# Altium PCB pcb_full_revC.PcbDoc
Units mm, origin at the board's own origin, x right, y up, seen from the top; angles counter-clockwise.
Board outline 60 x 60 mm, 2 copper layers (Top Layer, Bottom Layer); 37 components, 47 nets, 149 pads, 40 vias.
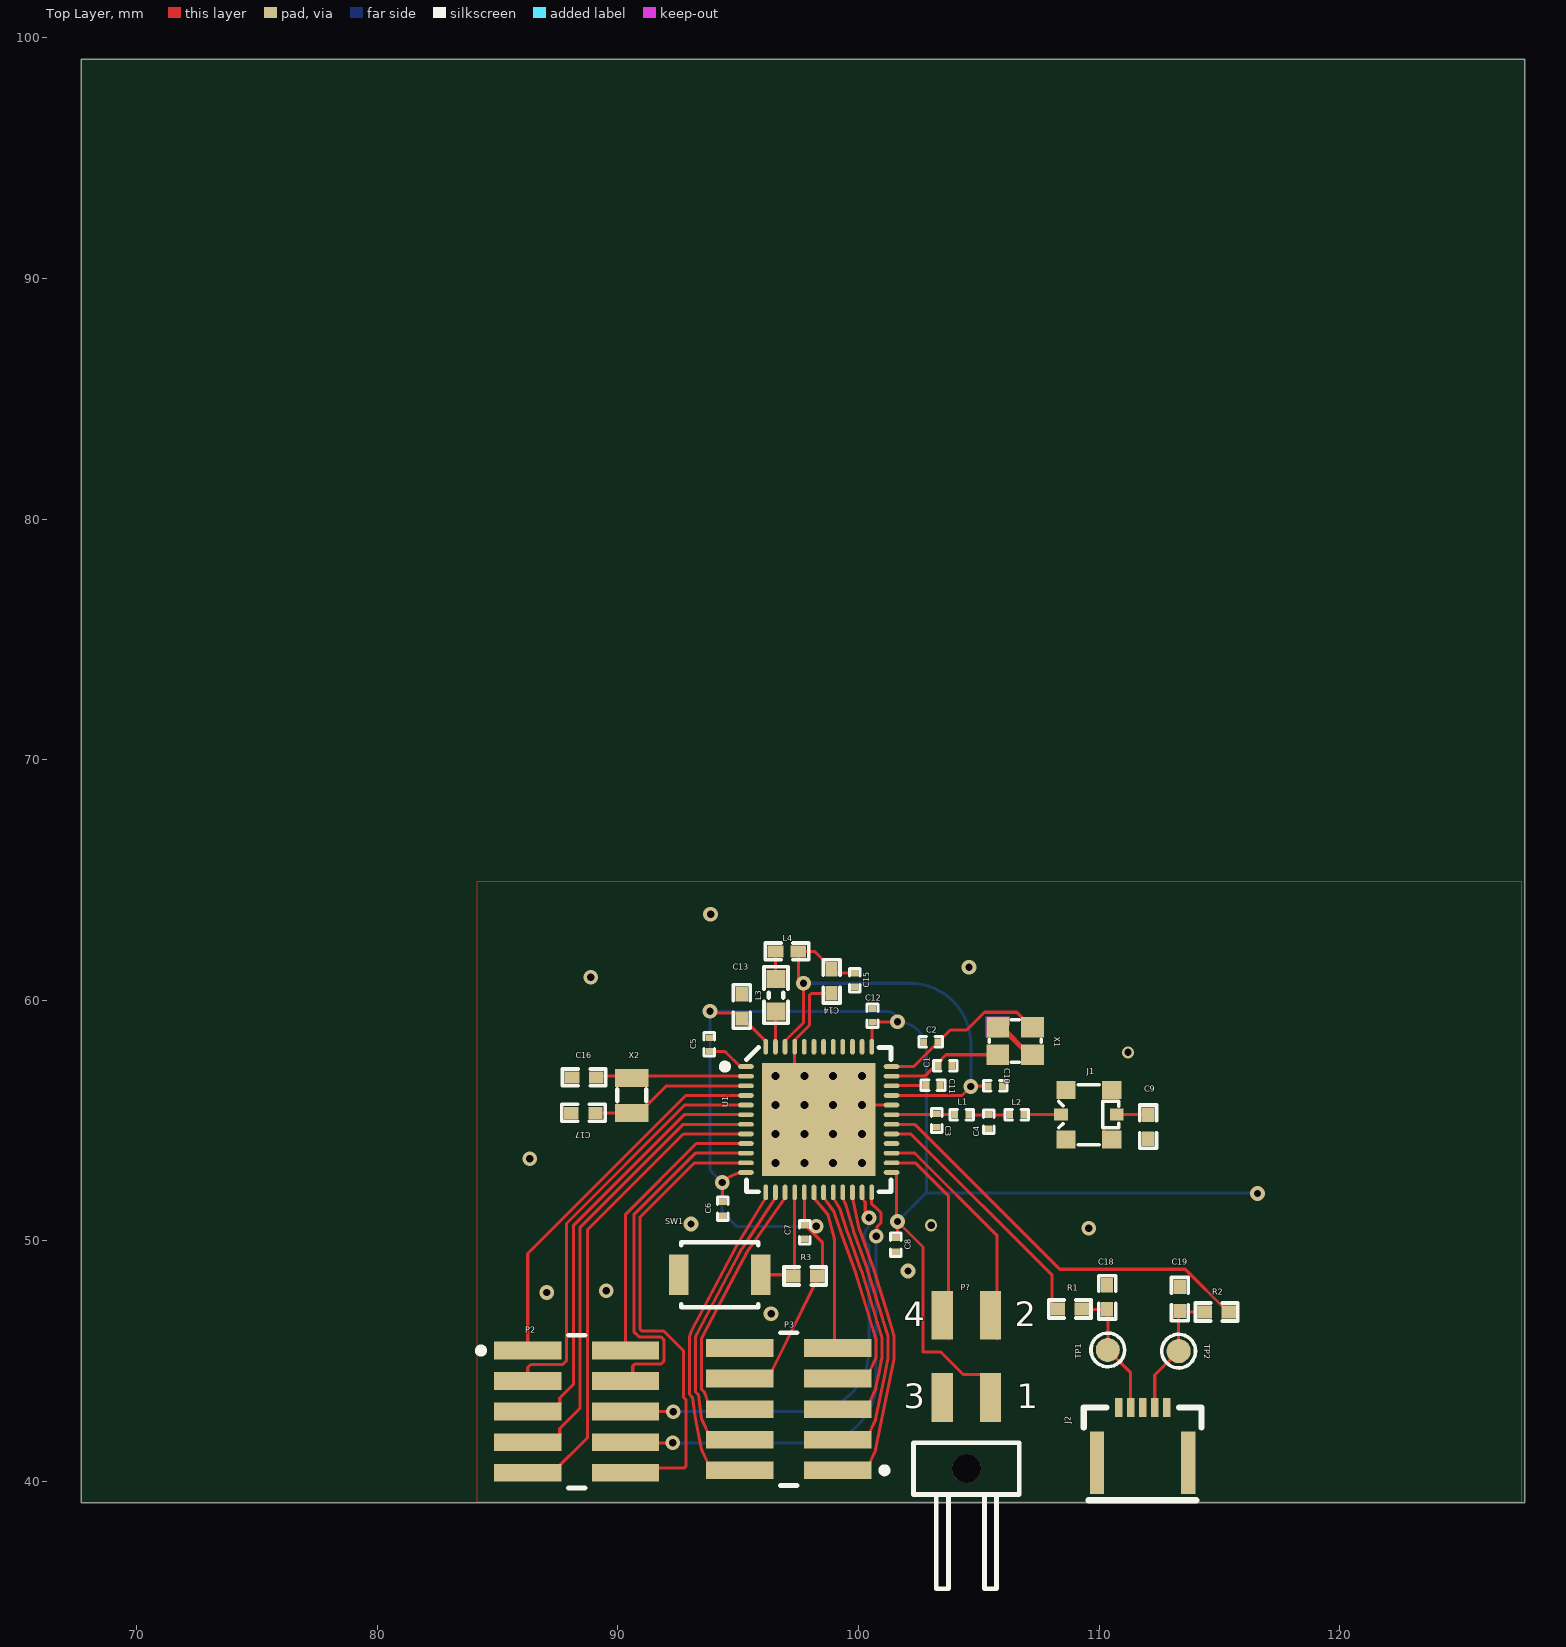
[diagram p0: Top Layer view]
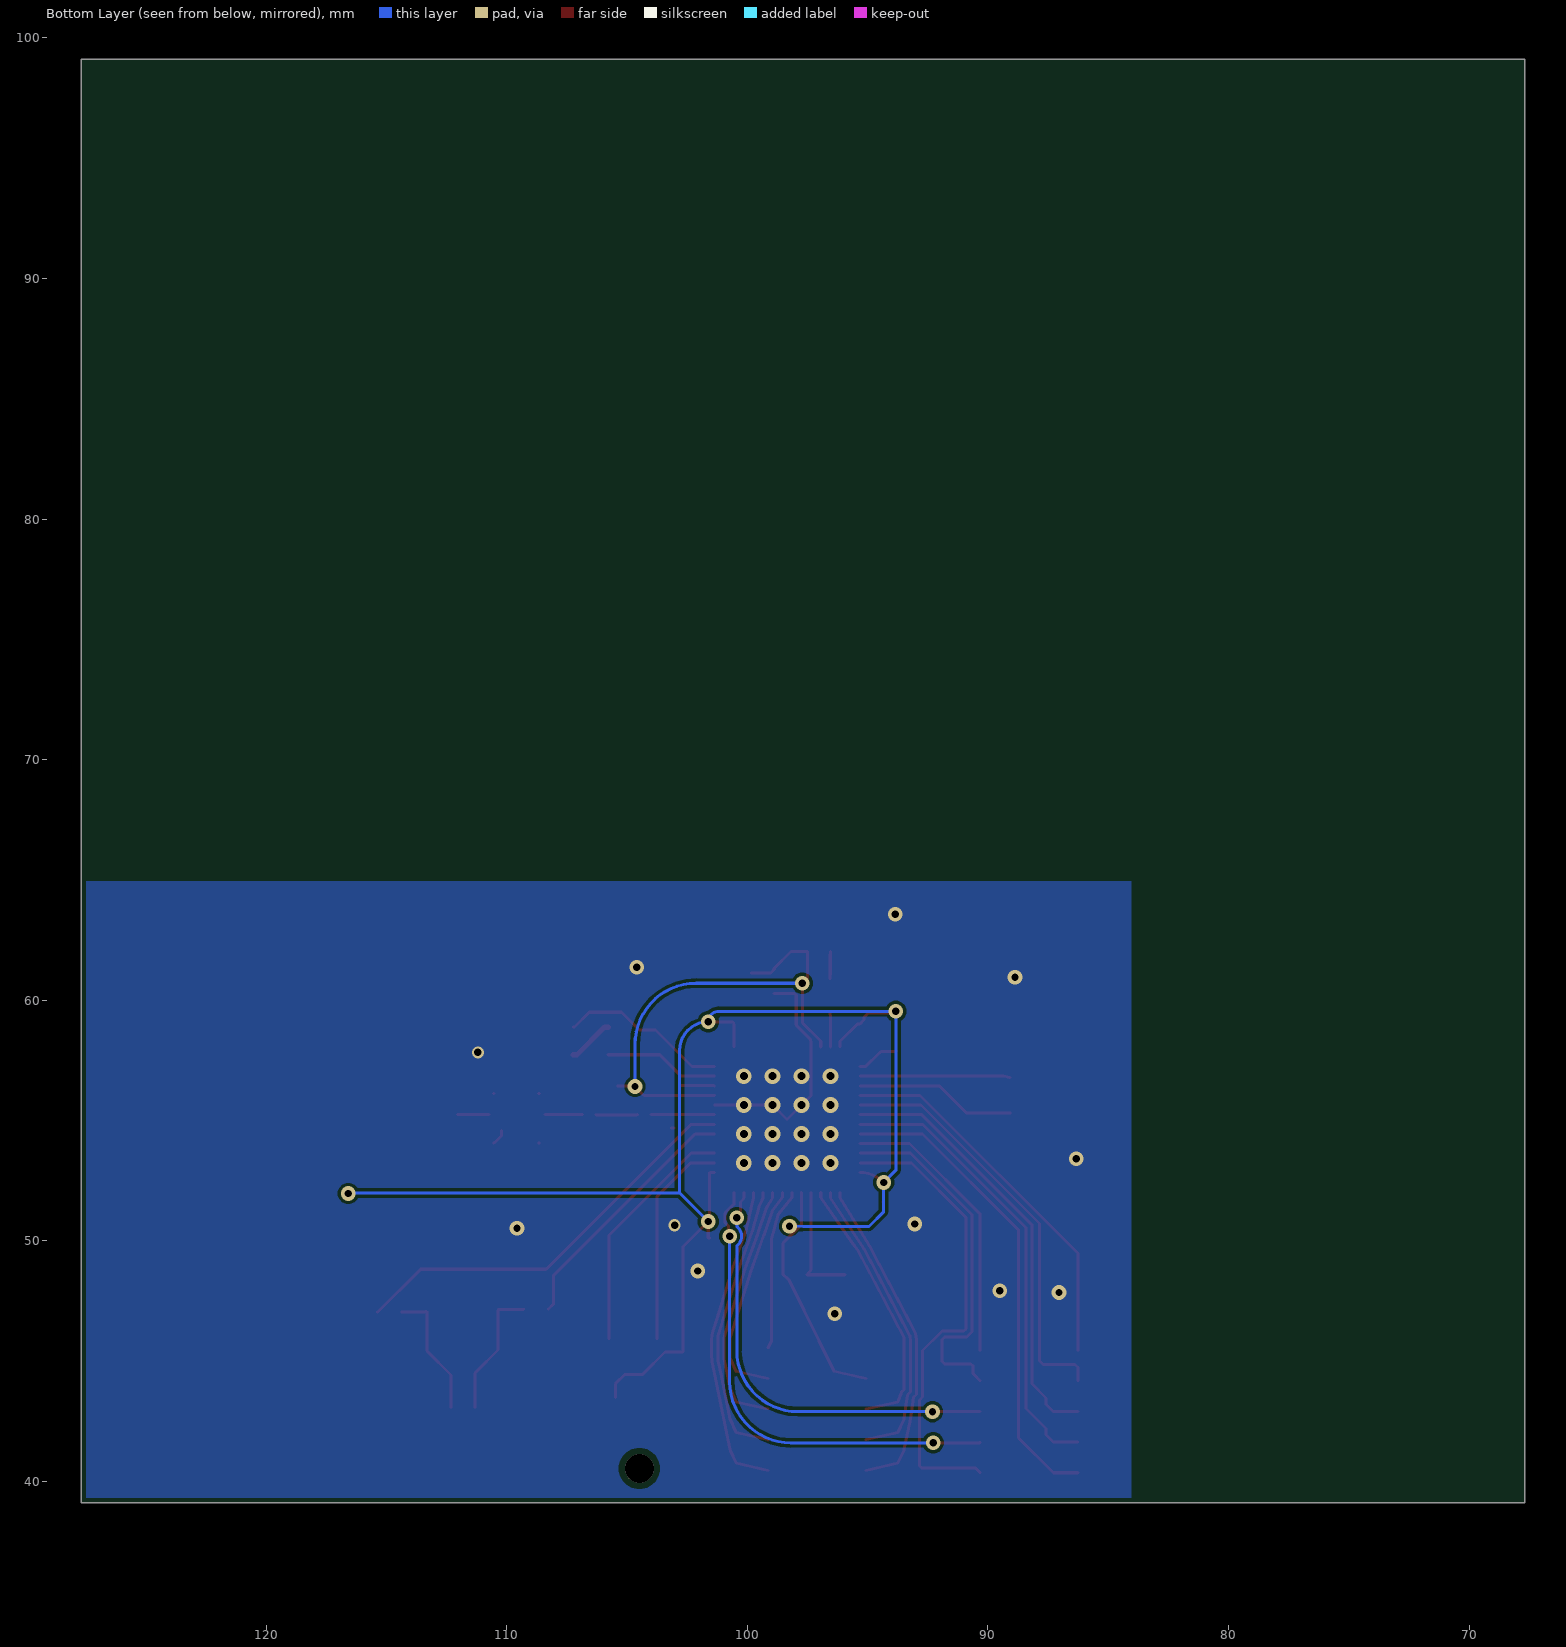
[diagram p1: Bottom Layer view, seen from below]
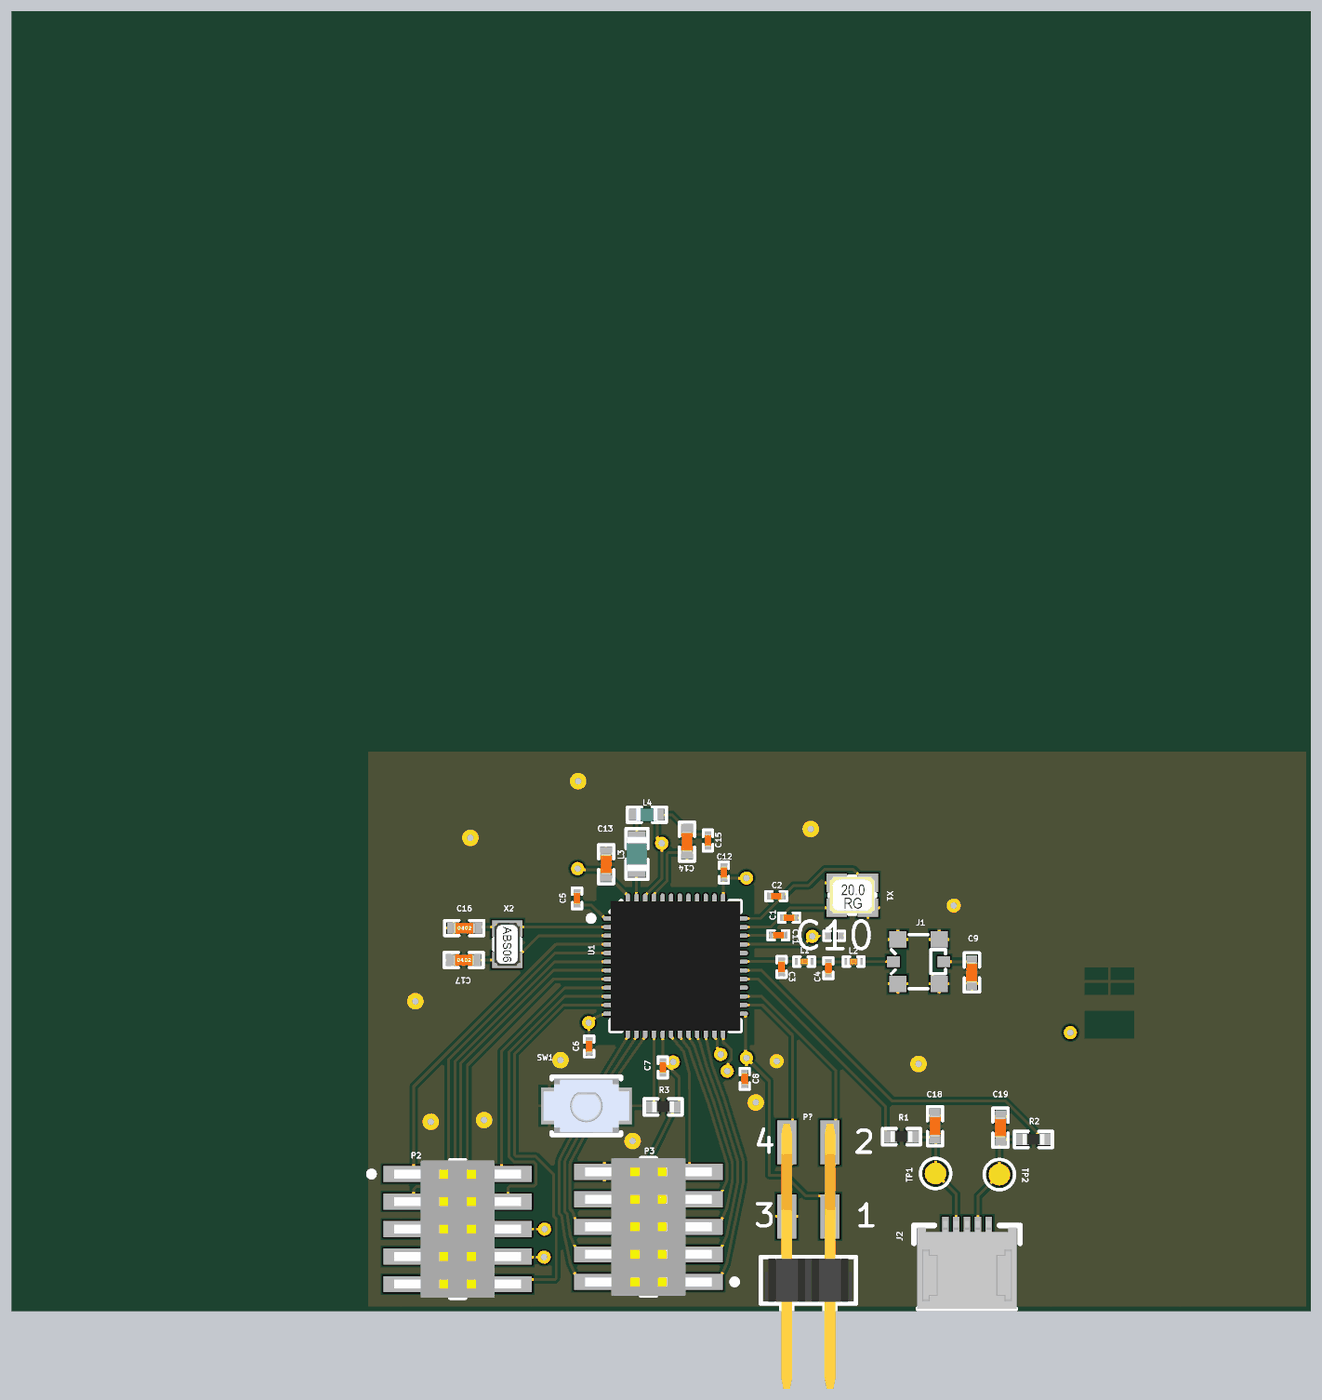
[diagram p2: 3D render of the assembled board from above, using the file's embedded part models]

## Layer stack, top to bottom
Top Solder: solder mask 0.0102, Solder Resist, Dk 3.5
Top Layer: signal copper 0.0356
Dielectric 1: dielectric 0.32, FR-4, Dk 4.8
Bottom Layer: signal copper 0.0356
Bottom Solder: solder mask 0.0102, Solder Resist, Dk 3.5

## Board outline
67.691,39.116 67.691,99.116 127.691,99.116 127.691,39.116

## Design rules (kind name [scope] priority, off if disabled: settings)
BoardOutlineClearance [All] p1: gap=0.2 ignorepadtopadclearanceinfootprint=FALSE
Clearance [All] p1: gap=0.127 ignorepadtopadclearanceinfootprint=FALSE except(0.25: Arc-Hole Track-Hole SMDPad-Hole THPad-Hole Via-Hole Fill-Hole Poly-Hole Region-Hole Text-Hole)
ComponentClearance [All] p1: gap=0.127 collisioncheckmode=3 verticalgap=0.127 showdistances=TRUE
DiffPairsRouting [All] p1: maxlimit=0.254 minlimit=0.127 mostfreqgap=0.127 toplayer_minwidth=0.127 toplayer_maxwidth=25.4 toplayer_prefwidth=0.127 bottomlayer_minwidth=0.127 bottomlayer_maxwidth=25.4 bottomlayer_prefwidth=0.127 maxuncoupledlength=12.7
Height [All] p1: minheight=0 maxheight=1816.048 prefheight=12.7
HoleSize [All] p1: absolutevalues=TRUE maxlimit=6.3 minlimit=0.3 maxpercent=80.000 minpercent=20.000
HoleToHoleClearance [All] p1: gap=0.25 allowstackedmicrovias=FALSE
MinimumAnnularRing [All] p1: minimumring=0.076
MinimumSolderMaskSliver [All] p1: minsoldermaskwidth=0
PlaneClearance [All] p1: clearance=0.127
PlaneConnect PlaneConnectPowerPads [InPadClass('PowerPads')] p1: planeconnectstyle=Direct reliefexpansion=0.508 reliefentries=4 reliefconductorwidth=0.254 reliefairgap=0.254
PlaneConnect [All] p2: pad.planeconnectstyle=Relief pad.reliefexpansion=0.3 pad.reliefentries=4 pad.reliefconductorwidth=0.127 pad.reliefairgap=0.127 via.planeconnectstyle=Direct via.reliefexpansion=0.3 via.reliefentries=4 via.reliefconductorwidth=0.127 via.reliefairgap=0.127
PolygonConnect PolygonConnectPowerPads [All vs (InPadClass('PowerPads'))] p1: connectstyle=Direct reliefconductorwidth=0.254 reliefentries=4 polygonreliefangle="90 Angle" airgapwidth=0.254
PolygonConnect [All] p2: thpad.connectstyle=Relief thpad.reliefconductorwidth=0.127 thpad.reliefentries=4 thpad.polygonreliefangle="90 Angle" thpad.airgapwidth=0.127 smdpad.connectstyle=Relief smdpad.reliefconductorwidth=0.127 smdpad.reliefentries=4 smdpad.polygonreliefangle="90 Angle" smdpad.airgapwidth=0.127 via.connectstyle=Direct via.reliefconductorwidth=0.127 via.reliefentries=4 via.polygonreliefangle="90 Angle" via.airgapwidth=0.127
RoutingVias [All] p1: holewidth=0.3 width=0.6 viastyle="Through Hole" minholewidth=0.3 minwidth=0.6 maxholewidth=0.6 maxwidth=6.6
SilkToSilkClearance [All] p1: silktosilkclearance=0
SilkToSolderMaskClearance [IsPad] p1: minsilkscreentomaskgap=0.127 clearancetoexposedcopper=TRUE
SolderMaskExpansion [All] p1: expansion=0.075 istentingtop=FALSE
Width [All] p1: maxlimit=25.4 minlimit=0.127 preferedwidth=0.127 minimp=50.000000 maximp=50.000000 favimp=50.000000
20 further rules are at their usual default settings.

## Components (designator, comment, footprint, x,y, rotation, side; value= is the part's Value field where it differs from the comment)
C1 "12pF" CAPC0603X03L_C 103.601,57.277 r0 top
C2 "12pF" CAPC0603X03L_C 103.003,58.268 r180 top
C3 "1.0pF" CAPC0603X03L_C 103.249,55.002 r90 top
C4 "1.2pF" CAPC0603X03L_C 105.41,54.946 r90 top
C5 "100nF" CAPC0603X03L_C 93.802,58.166 r90 top
C6 "100nF" CAPC0603X03L_C 94.361,51.333 r270 top
C7 "100nF" CAPC0603X03L_C 97.765,50.363 r270 top
C8 "100nF" CAPC0603X03L_C 101.549,49.835 r270 top
C9 "1.2pF" CAPC1005X04L 112.039,54.745 r270 top
C10 "N.C." CAPC0603X03L_C_NC 105.684,56.439 r180 top
C11 "100pF" CAPC0603X03L_C 103.099,56.464 r0 top
C12 "100nF" CAPC0603X03L_C 100.584,59.36 r90 top
C13 "1.0µF" CAPC1005X04L 95.148,59.741 r90 top
C14 "1.0µF" CAPC1005X04L 98.882,60.782 r90 top
C15 "47nF" CAPC0603X03L_C 99.847,60.839 r270 top
C16 "12pF" CAPC1005X04L 88.595,56.794 r180 top
C17 "12pF" CAPC1005X04L 88.57,55.321 r180 top
C18 "300pF" CAPC1005X04L 110.338,47.65 r90 top
C19 "300pF" CAPC1005X04L 113.36,47.582 r270 top
J1 "MM8130-2600" COAXIAL-SWF 109.576,55.245 r90 top (schematic designator J4)
J2 "" FPC_05P-0.5mm-RA-SMD 110.816,43.067 r0 top value="FPC 0.5mm RA SMD"
L1 "4.7nH" INDC0603X03L_C 104.292,55.245 r0 top
L2 "2.2nH" INDC0603X03L_C 106.578,55.245 r0 top
L3 "10µH" INDC1608X06L 96.571,60.213 r270 top
L4 "15nH" INDC1005X04L 97.028,62.027 r180 top
P2 "FTSH-105-01-L-DV" SMTC-FTSH-105-01-L-DV_V 88.287,42.901 r270 top
P3 "FTSH-105-01-L-DV" SMTC-FTSH-105-01-L-DV_V 97.101,43.002 r90 top
P? "621304284521" 621304284521 104.486,40.535 r0 top
R1 "0R" RESC1005X04L 108.79,47.168 r180 top
R2 "0R" RESC1005X04L 114.884,47.041 r0 top
R3 "N.C." RESC1005X04L 97.782,48.539 r0 top
SW1 "B3U-1000P" FP-B3U-1000P-MFG 94.234,48.59 r0 top
TP1 "Ø1.0mm,SMD" TP_SMD_Ø1.0mm 110.363,45.466 r0 top
TP2 "Ø1.0mm,SMD" TP_SMD_Ø1.0mm 113.309,45.415 r90 top
U1 "nRF52840-QFAA" QFN40P600X600X90-48N 98.349,55.042 r0 top
X1 "" XTAL_2016_NT 106.514,58.309 r0 top value=32MHz
X2 "" XTAL_2012 90.576,56.046 r270 top value=32.768kHz

## Footprints (in the part's own frame and the unit in brackets; to place one, negate y for a bottom-side part, rotate by r counter-clockwise, add the part's x,y. Pads: shape width x height; smd on the part's side, far side on the other; paste and mask are expansions set on the pad)
621304284521 [mm] "Pin Header, pitch 2.00 mm, SMD, Angled, dual row, 4p"
  rect 0.89x2.03 smd: 1(1,2.95) 2(1,6.37) 3(-1,2.95) 4(-1,6.37)
  round 1.2 hole 1.2 unplated: MH1(0,0)
  silkscreen extent -2.2,-5 2.2,1.07, body extent -2,-5 2,7.22, height 4.02
CAPC0603X03L_C [mm]
  rect 0.27x0.3 smd: 1(-0.285,0) 2(0.285,0)
  silkscreen extent -0.49,-0.22 0.49,0.22, body extent -0.3,-0.15 0.31,0.15, height 0.3
CAPC0603X03L_C_NC [mm]
  rect 0.27x0.3 smd mask+0.05: 1(-0.285,0) 2(0.285,0)
  silkscreen extent -0.49,-0.22 0.49,0.22
CAPC1005X04L [mm]
  rect 0.6x0.5 smd: 1(-0.5,0) 2(0.5,0)
  silkscreen extent -0.9,-0.35 0.9,0.35, body extent -0.51,-0.25 0.51,0.25, height 0.5
COAXIAL-SWF [mm]
  rect 0.5x0.58 smd: 1(0,1.16) 3(0,-1.16)
  rect 0.75x0.8 smd: 2(-1.025,-0.95) 2(-1.025,0.95) 2(1.025,-0.95) 2(1.025,0.95)
  Top Layer pour cut-out: -0.65,0.55 0.65,0.55 0.65,1.35 -0.65,1.35
  Top Layer pour cut-out: 0.65,-0.55 -0.65,-0.55 -0.65,-1.35 0.65,-1.35
  silkscreen extent -1.25,-1.25 1.25,1.25, body extent -1.26,-1.3 1.26,1.3, height 1.55
FP-B3U-1000P-MFG [mm]
  rect 0.8x1.7 smd paste+0 mask+0: 1(-1.7,0) 2(1.7,0)
  silkscreen extent -1.6,-1.35 1.6,1.35, body extent -2.2,-1.45 2.2,1.45, height 0.25
FPC_05P-0.5mm-RA-SMD [mm]
  rect 0.6x2.6 smd: 0(-0.9,-2.3) 0(2.9,-2.3)
  rect 0.3x0.8 smd: 1(0,0) 2(0.5,0) 3(1,0) 4(1.5,0) 5(2,0)
  silkscreen extent -1.45,-3.85 3.45,0, body extent -1.3,-3.85 3.3,0.2, height 1.2
INDC0603X03L_C [mm]
  rect 0.27x0.3 smd: 1(-0.285,0) 2(0.285,0)
  silkscreen extent -0.49,-0.22 0.49,0.22, body extent -0.31,-0.16 0.31,0.16, height 0.26
INDC1005X04L [mm]
  rect 0.65x0.5 smd: 1(-0.475,0) 2(0.475,0)
  silkscreen extent -0.9,-0.35 0.9,0.35, body extent -0.5,-0.3 0.5,0.3, height 0.5
INDC1608X06L [mm]
  rect 0.75x0.8 smd: 1(-0.675,0) 2(0.675,0)
  silkscreen extent -1.17,-0.5 1.17,0.5, body extent -0.8,-0.48 0.8,0.48, height 0.8
QFN40P600X600X90-48N [mm]
  oval 0.65x0.2 smd: 1(-3.025,2.2) 2(-3.025,1.8) 3(-3.025,1.4) 4(-3.025,1) 5(-3.025,0.6) 6(-3.025,0.2) 7(-3.025,-0.2) 8(-3.025,-0.6) 9(-3.025,-1) 10(-3.025,-1.4) 11(-3.025,-1.8) 12(-3.025,-2.2) 25(3.025,-2.2) 26(3.025,-1.8) 27(3.025,-1.4) 28(3.025,-1) 29(3.025,-0.6) 30(3.025,-0.2) 31(3.025,0.2) 32(3.025,0.6) 33(3.025,1) 34(3.025,1.4) 35(3.025,1.8) 36(3.025,2.2)
  oval 0.2x0.65 smd: 13(-2.2,-3.025) 14(-1.8,-3.025) 15(-1.4,-3.025) 16(-1,-3.025) 17(-0.6,-3.025) 18(-0.2,-3.025) 19(0.2,-3.025) 20(0.6,-3.025) 21(1,-3.025) 22(1.4,-3.025) 23(1.8,-3.025) 24(2.2,-3.025) 37(2.2,3.025) 38(1.8,3.025) 39(1.4,3.025) 40(1,3.025) 41(0.6,3.025) 42(0.2,3.025) 43(-0.2,3.025) 44(-0.6,3.025) 45(-1,3.025) 46(-1.4,3.025) 47(-1.8,3.025) 48(-2.2,3.025)
  rect 4.7x4.7 smd: 49(0,0)
  silkscreen extent -4.02,-3 3,3, body extent -3.02,-3.02 3.02,3.02, height 0.86
RESC1005X04L [mm]
  rect 0.6x0.55 smd: 1(-0.5,0) 2(0.5,0)
  silkscreen extent -0.87,-0.38 0.88,0.38, body extent -0.5,-0.25 0.5,0.25, height 0.3
SMTC-FTSH-105-01-L-DV_V [mm] "CONN, 10-Leads, Body 6.35x3.43mm, Pitch 1.27mm"
  rect 0.74x2.79 smd: 1(-2.54,-2.035) 2(-2.54,2.035) 3(-1.27,-2.035) 4(-1.27,2.035) 5(0,-2.035) 6(0,2.035) 7(1.27,-2.035) 8(1.27,2.035) 9(2.54,-2.035) 10(2.54,2.035)
  silkscreen extent -3.17,-4.1 3.17,0.34, body extent -3.17,-2.92 3.18,2.92, height 5.96
TP_SMD_Ø1.0mm [mm]
  round 1 smd paste-5: 1(0,0)
  silkscreen extent -0.7,-0.7 0.7,0.7
XTAL_2012 [mm]
  rect 0.75x1.4 smd: 1(-0.725,0) 2(0.725,0)
  silkscreen extent -0.24,-0.6 0.24,0.6, body extent -1,-0.61 1,0.61, height 0.6
XTAL_2016_NT [mm]
  rect 0.95x0.85 smd: 1(-0.725,-0.575) 2(-0.725,0.575) 2(0.725,-0.575) 3(0.725,0.575)
  Top Layer lines w0.225: -0.725,0.575 -0.575,0.575 0.575,-0.575 0.725,-0.575
  Top Layer keep-out lines w0.01: -0.55,0.15 -1.2,0.15 -1.2,1 -0.25,1 -0.25,0.65
  silkscreen extent -1.08,-0.88 1.08,0.88, body extent -1.05,-0.85 1.05,0.85, height 0.56

## Part data
C1 C2: library part C0201-12p, "Capacitor, NP0, ±2%", Component Class=Capacitors, Footprint Doc=0201, LatestRevisionDate=2017-11-09, Pad Count=2, Part Number=C0201-12p, Published=2014-11-13
C3: library part C0201-1.0p, "Capacitor, NP0, ±10%", Component Class=Capacitors, Footprint Doc=0201, LatestRevisionDate=2018-10-22, Pad Count=2, Part Number=C0201-1.0p, Published=2014-11-13
C4: library part C0201-1.2p, "Capacitor, NP0, ±10%", Component Class=Capacitors, Footprint Doc=0201, LatestRevisionDate=2020-10-13, Pad Count=2, Part Number=C0201-1.2p, Published=2014-11-13
C5 C6 C7 C8 C12: library part C0201-100n, "Capacitor, X5R, ±10%", Component Class=Capacitors, Footprint Doc=0201, LatestRevisionDate=2017-11-09, Pad Count=2, Part Number=C0201-100n, Published=2014-11-13
C9: library part C0402-1.2p, "Capacitor, NP0, ±0.1pF", Manufacturer=N.A., Part number IPS=00000005410, Artikkelnr Noca=20029157, Author=rsk, Component Class=Capacitors, ComponentLink1Description=Datasheet, ComponentLink1URL=N.A., ComponentLink2Description="Supplier link", ComponentLink2URL=N.A., Footprint Doc=0402, HelpURL=N.A., LatestRevisionDate=2011-05-11, Manufacturer Part Number=N.A., Note=50V, Pad Count=2, Part Number=C0402-1.2p, Part number Norautron=N.A., PartId=100200119, Pin Count=2, Published=2009-05-08, Publisher="Nordic Semiconductor", Supplier 1=N.A., Supplier 2=N.A., Supplier Part Number 1=N.A., Supplier Part Number 2=N.A.
C10: library part C0201-N.C., "Not mounted", Assembly="Not mounted", Component Class=Capacitors, Footprint Doc=0201, LatestRevisionDate=2014-11-13, Pad Count=2, Part Number=C0201-N.C., Published=2014-11-13
C11: library part C0201-100p, "Capacitor, NP0, ±5%", Component Class=Capacitors, Footprint Doc=0201, LatestRevisionDate=2019-04-16, Pad Count=2, Part Number=C0201-100p, Published=2019-04-16
C13 C14: library part C0402-1µ0, "Capacitor, X5R, ±10%", Component Class=Capacitors, Footprint Doc=0402, LatestRevisionDate=2016-08-22, Pad Count=2, Part Number=C0402-1µ0, Published=2009-05-08
C15: library part C0201-47n, "Capacitor, X5R, ±10%", Component Class=Capacitors, Footprint Doc=0201, LatestRevisionDate=2017-11-09, Pad Count=2, Part Number=C0201-47n, Published=2014-11-13
C16 C17: library part C0402-12p, "Capacitor, NP0, ±2%", Manufacturer=N.A., Part number IPS=00000002398, Artikkelnr Noca=20029159, Author=rsk, Component Class=Capacitors, ComponentLink1Description=Datasheet, ComponentLink1URL=N.A., ComponentLink2Description="Supplier link", ComponentLink2URL=N.A., Footprint Doc=0402, HelpURL=N.A., LatestRevisionDate=2011-05-11, Manufacturer Part Number=N.A., Note=50V, Pad Count=2, Part Number=C0402-12p, Part number Norautron=N.A., PartId=100200137, Pin Count=2, Published=2009-05-08, Publisher="Nordic Semiconductor", Supplier 1=N.A., Supplier 2=N.A., Supplier Part Number 1=N.A., Supplier Part Number 2=N.A.
C18 C19: library part C0402-300p, "Capacitor, NP0, ±5%", Manufacturer=N.A., Part number IPS=00000007788, Supplier Part Number 1=490-3234-1-ND, Artikkelnr Noca=20020004, Author=rsk, Component Class=Capacitors, ComponentLink1Description=Datasheet, ComponentLink1URL=N.A., ComponentLink2Description="Supplier link", ComponentLink2URL=N.A., Footprint Doc=0402, HelpURL=N.A., LatestRevisionDate=2020-10-13, Manufacturer Part Number=N.A., Note=50V, Pad Count=2, Part Number=C0402-300p, Part number Norautron=N.A., PartId=100200155, Pin Count=2, Published=2015-05-29, Publisher="Nordic Semiconductor", Supplier 1=Digi-Key, Supplier 2=N.A., Supplier Part Number 2=N.A.
J1: library part CMP-15831-000105-1, "CONN HEADER VERT 2POS 2.54MM", Manufacturer=Murata, Part number IPS=00000009955, Part number Norautron=N.A., Supplier Part Number 1=490-4981-1-ND, Artikkelnr Noca=55029011, Author=rsk, Component Class=Connectors, ComponentLink1Description=Datasheet, ComponentLink1URL=N.A., ComponentLink2Description="Supplier link", ComponentLink2URL=N.A., Footprint Doc=COAXIAL-SWF, HelpURL=http://www.murata.com/products/catalog/pdf/o33e.pdf, LatestRevisionDate=2014-04-24, Manufacturer Part Number=MM8130-2600, Note=N.A., Pad Count=3, Part Number=MM8130-2600, PartId=100500400, Pin Count=3, Published=2014-04-24, Publisher="Nordic Semiconductor", Supplier 1=Digi-Key, Supplier 2=Mouser, Supplier Part Number 2=81-MM8130-2600RA2
J2: library part FPC_05P-0.5mm-RA-SMD, "0.5mm FPC, 5P,Right Angle SMT,Double Contact,H=1.2mm,White, Tin plated", Manufacturer=W-CON, Manufacturer Part Number=5141-05RZDNWR01, Part number IPS=00000007792, Part number Norautron=N.A., Artikkelnr Noca=55010020, Author=rsk, Component Class=Connectors, ComponentLink1Description=Datasheet, ComponentLink1URL=N.A., ComponentLink2Description="Supplier link", ComponentLink2URL=N.A., Footprint Doc=FPC_05P-0.5mm-RA-SMD, HelpURL=\\hizz\pro\app9717\Datasheet\connectors\W-CON\5141-XXRZDNXX0X.pdf, LatestRevisionDate=2016-04-21, Note=N.A., Pad Count=7, Part Number=FPC_05P-0.5mm-RA-SMD, PartId=100500528, Pin Count=7, Published=2015-06-22, Publisher="Nordic Semiconductor", Supplier 1=Cabcon, Supplier 2=Digi-Key, Supplier Part Number 1=5141-05RZDNWR01, Supplier Part Number 2=WM9836CT-ND
L1: library part L0201-4n7, "High frequency chip inductor ±5%", Component Class=Inductors, Footprint Doc=0201, LatestRevisionDate=2013-04-10, Pad Count=2, Part Number=L0201-4n7, Published=2013-04-10
L2: library part L0201-2n2, "High frequency chip inductor ±5%", Component Class=Inductors, Footprint Doc=0201, LatestRevisionDate=2013-04-10, Pad Count=2, Part Number=L0201-2n2, Published=2013-04-10
L3: library part L0603-10µ-TDK, "Chip inductor, IDC,min = 50 mA, ±20%", Component Class=Inductors, Footprint Doc=0603, LatestRevisionDate=2012-09-19, Pad Count=2, Part Number=L0603-10µ-TDK, Published=2019-05-06
L4: library part L0402-15n, "High frequency chip inductor ±10%", Component Class=Inductors, Footprint Doc=0402, LatestRevisionDate=2012-09-19, Pad Count=2, Part Number=L0402-15n, Published=2010-07-12
P2 P3: library part CMP-2000-05354-1, "Male Header, Pitch 1.27 mm, 2 x 5 Position, Height 5.96 mm, -55 to 125 degC, RoHS, Bulk", Color=Black, Manufacturer=Samtec, Standard Package=1, Catalog Drawings=FTSHSeriesFTSHSeriesSMTSide, Category=Connectors,Interconnects, Connector Type=Header,Unshrouded, Contact Finish=Gold, Contact Finish Thickness=10µin(0.25µm), Contact Mating Length="0.120\"(3.05mm)", Contact Type=MalePin, Datasheet URL=https://datasheet.ciiva.com/30493/0900766b80adfe36-30493006.pdf, Datasheet Version=Feb-08, EDA / CAD Models=DownloadfromAcceleratedDesigns, Family=RectangularConnectors-Headers,MalePins, Fastening Type=-, Featured Product=Board-To-BoardInterconnectSystems, Features=-, Manufacturer URL=http://www.samtec.com/, Mating Products="FLE-105-01-G-DV-TR-ND-CONNSKT1.27MM10POSDUALSMDCLP-105-02-G-D-P-TR-ND-CONNRCPT10POSDUAL.05\"SMDSFMC-105-L2-S-D-TR-ND-CONN.05\"SURFACE10POSSMTSFMH-105-02-L-D-TR-ND-CONNRECEPT10POS.50\"SMTFLE-105-01-G-DV-A-ND-CONNSKT1.27MM10POSDUALSMDCLP-105-02-G-D-BE-ND-CONNRCPT10POSDUAL.05\"SMDFLE-105-01-G-DV-A-P-ND-CONNSKT1.27MM10POSDUALSMDSAM1153-05-ND-CONNRCPT10POSDUAL.05\"SMDSAM1155-05-ND-CONNRCPT10POSDUAL.05\"SMDSAM1154-05-ND-CONNRCPT10POSDUAL.05\"SMDSFMH-105-02-L-D-LC-ND-CONNRECEPT10POS.50\"SMTSAM1226-05-ND-CONNRCPT.05\"10POSDUALSMD", Mounting Type=SurfaceMount, Number of Positions=10, Number of Positions Loaded=All, Number of Rows=2, Online Catalog=FTSHSeries, Other Names=SAM1161-05, Packaging=Bulk, Pitch="0.050\"(1.27mm)", Product Training Modules=Board-to-BoardConnectors, Row Spacing="0.050\"(1.27mm)", Series=FTSH, Termination=Solder
P?: library part CMP-1502-01004-2, Contact Resistance=20mΩ, Current Rating=2A, Operating Supply Voltage=200V, Gender=Male, Lead Pitch=2mm, NexarPartId=91439896, Number of Pins=4, Packaging="Tape and Reel", RoHS=Compliant
R1 R2: library part R0402-0R, "Resistor, ±5%, 0.063W", Manufacturer=N.A., Part number IPS=00000007128, Supplier Part Number 1=146-9661, Artikkelnr Noca=27049000, Author=rsk, Component Class=Resistors, ComponentLink1Description=Datasheet, ComponentLink1URL=N.A., ComponentLink2Description="Supplier link", ComponentLink2URL=N.A., Footprint Doc=0402, HelpURL=N.A., LatestRevisionDate=2009-11-23, Manufacturer Part Number=N.A., Note="Chip Res 5%", Pad Count=2, Part Number=R0402-0R, Part number Norautron=N.A., PartId=100100109, Pin Count=2, Published=2009-05-08, Publisher="Nordic Semiconductor", Supplier 1=Farnell, Supplier 2=N.A., Supplier Part Number 2=N.A.
R3: library part R0402-N.C., "Not mounted", Manufacturer=N.A., Artikkelnr Noca=N.A., Assembly="Not mounted", Author=rsk, Component Class=Resistors, ComponentLink1Description=Datasheet, ComponentLink1URL=N.A., ComponentLink2Description="Supplier link", ComponentLink2URL=N.A., Footprint Doc=0402, HelpURL=N.A., LatestRevisionDate=2009-05-08, Manufacturer Part Number=N.A., Note="Chip Res", Pad Count=2, Part Number=R0402-N.C., Part number IPS=N.A., Part number Norautron=N.A., PartId=100100281, Pin Count=2, Published=2009-05-08, Publisher="Nordic Semiconductor", Supplier 1=N.A., Supplier 2=N.A., Supplier Part Number 1=N.A., Supplier Part Number 2=N.A.
SW1: library part CMP-2100-03586-2, "SWITCH TACTILE SPST-NO 0.05A 12V", Contact Current Rating=50mA, Contact Resistance=100mR, Insulation Resistance=100MR, Max Operating Temperature=70°C, Max Voltage Rating (DC)=12V, Min Operating Temperature=-25°C, Operating Force=1.5N, Package Quantity=1, Ratings="Dust Proof", Actuator Length=0.4mm, Actuator Type=Standard, Contact Material=Silver, Current Rating=50mA, Depth=2.5mm, Electrical Life=200000Cycles, Height=1.2mm, Illumination Type=Non-Illuminated, Lead Free="Lead Free", Length=4mm, Max Current Rating=50mA, Mechanical Life=200000Cycles, Mount="Surface Mount", Orientation=Straight, Packaging="Tape and Reel", Switch Function=Off-Mom, Switch Travel=0.15mm, Termination=SMD/SMT, Throw Configuration=SPST, Voltage Rating (DC)=12V, Weight=0.000776oz, Width=3mm
TP1 TP2: library part TP_SMD_Ø1.0MM, "1.0mm circular SMD testpad", Manufacturer="Nordic Semiconductor", Manufacturer Part Number=N.A., Artikkelnr Noca=N.A., Author=rsk, Component Class=Connectors, ComponentLink1Description=Datasheet, ComponentLink1URL=N.A., ComponentLink2Description="Supplier link", ComponentLink2URL=N.A., Footprint Doc=TP_SMD_Ø1.0mm, HelpURL=N.A., LatestRevisionDate=2021-03-05, Note=N.A., Pad Count=1, Part Number=TP_SMD_Ø1.0MM, Part number IPS=N.A., Part number Norautron=N.A., PartId=100500475, Pin Count=1, Published=2013-06-11, Publisher="Nordic Semiconductor", Supplier 1=N.A., Supplier 2=N.A., Supplier Part Number 1=N.A., Supplier Part Number 2=N.A.
U1: "Multi-protocol Bluetooth Low Energy, IEEE 802.15.4, ANT and 2.4GHz proprietary system-on-chip", Component Class=nRF_Devices, Footprint Doc=QFN-48, LatestRevisionDate=2016-11-22, Pad Count=48, Part Number=nRF52840-QFAA, Published=2016-03-31
X1: library part XTAL_SMD2016_32MHz_8pF_General_NT, "XTAL SMD 2016, 32MHz, Cl=8pF, Total Tol: ±30ppm", Component Class=Oscillators, Footprint Doc=XTAL_2016, LatestRevisionDate=2021-04-08, Pad Count=4, Part Number=XTAL_SMD2016_32MHz_8pF_General_NT, Published=2021-04-08
X2: library part XTAL_SMD2012_32.768kHz_9pF_General, "XTAL SMD 2012, 32.768kHz, Cl=9pF, Total Tol: ±50ppm", Component Class=Oscillators, Footprint Doc=XTAL_2012, LatestRevisionDate=2017-01-11, Pad Count=2, Part Number=XTAL_SMD2012_32.768kHz_9pF_General, Published=2016-08-19

## Via types
v1: diameter 0.61, hole 0.305, Top Layer to Bottom Layer, 22 vias
v2: diameter 0.66, hole 0.33, Top Layer to Bottom Layer, 16 vias
v3: diameter 0.5, hole 0.305, Top Layer to Bottom Layer, 2 vias

## Nets (pads, with @x,y where several pads share a name; then routed paths per layer and width w, separated by ;. In a path a pad name is that pad's centre, name@x,y a point inside that pad or via, vN(x,y) a via of type N, cw(c..) or ccw(c..) an arc to the next point about the centre after c; other vN are vias at no path point)
ANT: C9.1 J1.3 | length 1.3
  Top Layer w0.127: J1.3 C9.1
DEC1: C5.1 U1.1 | length 1.8
  Top Layer w0.127: C5.1 93.889,57.863 94.409,57.863 cw(c94.409,57.736) 94.498,57.827 95.099,57.242 U1.1
DEC3: C11.1 U1.34 | length 1.4
  Top Layer w0.127: U1.34 101.385,56.453 102.802,56.453 C11.1
DEC4_6: C10.2 C14.2 C15.1 L4.1 U1.33 U1.46 | length 21.5
  Top Layer w0.127: U1.46 96.949,58.303 97.714,59.068 v1(97.714,60.706) cw(c97.714,60.917) 97.503,60.917 L4.1 98.188,62.027 98.882,61.332 C14.2 99.041,61.124 C15.1 ; U1.33@101.382,56.05 U1.33 104.302,56.042 v1(104.673,56.413) 104.686,56.426 105.386,56.426 C10.2
  Bottom Layer w0.127: v1(97.714,60.706) 102.133,60.706 cw(c102.133,58.166) 104.673,58.166 v1(104.673,56.413)
GND: C1.2 C2.2 C3.1 C4.1 C5.2 C6.2 C7.2 C8.2 C9.2 C10.1 C11.2 C12.2 C13.2 C14.1 C15.2 C16.2 C17.2 C18.2 C19.1 J1.2 P3.10 P?.3 SW1.1 U1.32 U1.45 U1.49 X1.2 | length 10.9
  Top Layer w0.127: C14.1 98.042,60.282 97.968,60.208 97.968,58.962 97.385,58.38 97.385,58.348 97.349,58.312 U1.45 97.349,56.042 v2(97.749,55.642) U1.49 v2(98.949,55.642) v2(100.149,55.642) U1.32 ; 103.048,54.686 C3.1@103.171,54.686 ; J1.2@108.651,54.068 J1.2@108.676,54.068 ; J1.2@108.651,56.118 J1.2@108.676,56.118 ; J1.2@110.214,54.579 110.214,54.379 110.526,54.068 J1.2@110.551,54.068 ; J1.2@110.526,56.118 J1.2@110.551,56.118
  other v1: 96.368,46.965 87.046,47.854 89.51,47.93 102.057,48.743 109.576,50.521 93.04,50.698 86.335,53.416 88.875,60.96 104.597,61.366 93.853,63.576
  other v2: 96.549,53.242 97.749,53.242 98.949,53.242 100.149,53.242 96.549,54.442 97.749,54.442 98.949,54.442 100.149,54.442 96.549,55.642 96.549,56.842 97.749,56.842 98.949,56.842 100.149,56.842
  other v3: 103.022,50.648 111.201,57.836
NetC3_2: C3.2 L1.1 U1.31 | length 2.6
  Top Layer w0.127: U1.31 101.381,55.249 103.041,55.249 103.048,55.256 103.053,55.251 104.002,55.251 L1.1
NetC4_2: C4.2 L1.2 L2.1 | length 1.7
  Top Layer w0.127: L1.2 104.585,55.238 105.403,55.238 C4.2 105.417,55.238 106.286,55.238 L2.1
NetL3_1: L3.1 L4.2 | length 1.1
  Top Layer w0.127: L4.2 96.556,61.84 96.556,61.199 L3.1
NetL3_2: L3.2 U1.47 | length 1.5
  Top Layer w0.127: U1.47 96.549,59.226 L3.2
NFC1: C18.1 J2.2 R1.1 TP1.1 | length 5.5
  Top Layer w0.127: R1.1 109.307,47.15 C18.1 110.363,47.125 TP1.1 111.316,44.513 J2.2
NFC2: C19.2 J2.4 R2.1 TP2.1 | length 5.5
  Top Layer w0.127: J2.4 112.316,44.422 TP2.1 113.309,47.031 C19.2 113.402,47.041 R2.1
P0.00/XL1: C16.1 U1.2 X2.1 | length 6.2
  Top Layer w0.127: C16.1 89.332,56.842 U1.2
P0.01/XL2: C17.1 U1.3 X2.2 | length 6.7
  Top Layer w0.127: C17.1 X2.2 90.901,55.321 92.022,56.442 U1.3
P0.02/AIN0: U1.40
P0.03/AIN1: U1.39
P0.04/AIN2: P2.1 U1.4 | length 15.8
  Top Layer w0.127: P2.1 86.252,49.473 92.821,56.042 U1.4
P0.05/AIN3: P2.3 U1.5 | length 17.5
  Top Layer w0.127: P2.3 86.252,44.731 86.383,44.861 87.708,44.861 87.86,45.014 87.86,50.722 92.78,55.642 U1.5
P0.07: P2.5 U1.6 | length 18.2
  Top Layer w0.127: P2.5 87.277,42.901 87.584,43.207 87.584,43.468 88.163,44.047 88.163,50.648 92.758,55.242 U1.6
P0.08: P2.7 U1.7 | length 19.1
  Top Layer w0.127: P2.7 87.277,41.631 87.584,41.937 87.584,42.198 88.417,43.031 88.417,50.542 92.717,54.842 U1.7
P0.09/NFC1: R1.2 U1.29 | length 10.6
  Top Layer w0.127: U1.29 101.383,54.432 102.184,54.432 108.053,48.563 108.053,47.379 108.265,47.168 R1.2
P0.10/NFC2: R2.2 U1.30 | length 17.2
  Top Layer w0.127: U1.30 102.338,54.842 108.361,48.819 113.581,48.819 115.359,47.041 R2.2
P0.11: P2.4 U1.10 | length 15
  Top Layer w0.127: P2.4 90.617,44.477 90.617,44.753 90.617,44.793 90.705,44.88 91.796,44.88 91.908,44.992 91.908,45.89 91.796,46.001 90.887,46.001 90.664,46.224 90.664,51.087 93.219,53.642 U1.10
P0.12: P2.10 U1.11 | length 19.6
  Top Layer w0.127: P2.10 90.524,40.562 92.764,40.562 92.839,40.636 92.839,43.388 92.719,43.508 92.719,45.438 91.902,46.255 90.992,46.255 90.918,46.329 90.918,50.982 93.174,53.238 95.324,53.238 U1.11
P0.13: P3.2 U1.13 | length 13.6
  Top Layer w0.127: 93.485,41.324 ccw(c93.671,41.362) 93.498,41.283 93.735,40.769 P3.2 ; 93.485,41.324 93.227,42.587 93.093,43.493 92.973,43.613 92.973,45.912 cw(c93.671,45.912) 93.054,46.238 94.917,49.767 cw(c95.534,49.44) 94.937,49.804 96.149,51.792 U1.13
P0.14: P3.4 U1.14 | length 12.3
  Top Layer w0.127: 93.485,42.594 ccw(c93.671,42.632) 93.498,42.553 93.735,42.039 P3.4 ; 93.485,42.594 93.481,42.613 93.347,43.598 93.227,43.718 93.227,45.912 cw(c93.671,45.912) 93.278,46.12 94.821,49.041 95.142,49.649 cw(c95.534,49.44) 95.163,49.684 95.49,50.182 96.549,51.792 U1.14
P0.17: P3.6 U1.15 | length 11.1
  Top Layer w0.127: P3.6 93.735,43.309 93.601,43.703 93.481,43.823 93.481,45.912 cw(c93.671,45.912) 93.503,46.001 95.075,48.979 95.366,49.529 cw(c95.534,49.44) 95.378,49.55 95.651,49.939 96.949,51.792 U1.15
P0.18/RESET: R3.1 SW1.2 U1.16 | length 5.1
  Top Layer w0.127: SW1.2 97.511,48.59 97.349,48.802 U1.16
P0.19: P3.9 U1.18 | length 6.7
  Top Layer w0.127: U1.18 98.149,51.792 98.703,51.128 98.704,51.127 cw(c98.606,51.047) 98.728,51.079 98.994,50.073 cw(c98.871,50.04) 98.998,50.042 ; 98.998,50.041 99.001,48.866 99.001,48.315 99.001,45.849 P3.9
P0.20: P3.7 U1.19 | length 9.3
  Top Layer w0.127: U1.19 98.549,51.792 98.962,51.234 ; 98.962,51.233 cw(c98.86,51.159) 98.98,51.201 99.315,50.235 ccw(c100.215,50.548) 99.319,50.225 99.873,48.693 cw(c99.753,48.65) 99.874,48.689 99.874,48.688 100.573,46.422 100.713,45.968 cw(c100.531,45.912) 100.722,45.912 100.722,45.172 cw(c100.531,45.172) 100.704,45.093 100.468,44.579 P3.7
P0.21: P3.5 U1.20 | length 10.5
  Top Layer w0.127: U1.20 98.949,51.792 99.222,51.342 ; P3.5 100.468,43.309 100.704,43.823 ccw(c100.531,43.902) 100.718,43.864 100.848,44.5 100.967,45.083 ccw(c100.531,45.172) 100.976,45.172 100.976,45.912 ccw(c100.531,45.912) 100.956,46.043 100.78,46.612 100.117,48.764 ccw(c99.753,48.65) 100.111,48.781 99.558,50.311 cw(c100.215,50.548) 99.55,50.335 99.234,51.316 ccw(c99.114,51.277) 99.223,51.341
P0.22: P3.3 U1.21 | length 11.8
  Top Layer w0.127: P3.3 100.468,42.039 100.704,42.553 ccw(c100.531,42.632) 100.718,42.594 101.076,44.351 101.216,45.032 ccw(c100.531,45.172) 101.23,45.172 101.23,45.912 ccw(c100.531,45.912) 101.199,46.118 101.023,46.687 ; U1.21 99.349,51.792 99.484,51.485 cw(c99.368,51.434) 99.49,51.469 99.787,50.426 ccw(c100.215,50.548) 99.797,50.398 100.35,48.866 cw(c99.753,48.65) 100.359,48.841 100.359,48.839 100.994,46.783 101.023,46.687
P0.23: P3.1 U1.22 | length 13
  Top Layer w0.127: P3.1 100.468,40.769 100.704,41.283 ccw(c100.531,41.362) 100.718,41.324 101.464,44.982 ccw(c100.531,45.172) 101.484,45.172 101.484,45.912 ccw(c100.531,45.912) 101.441,46.194 101.266,46.762 100.602,48.914 ccw(c99.753,48.65) 100.589,48.953 100.036,50.483 cw(c100.215,50.548) 100.029,50.508 99.749,51.792 U1.22
P0.24: P2.6 U1.23 | length 18.4
  Top Layer w0.127: P2.6 v1(92.304,42.901) ; U1.23 100.149,51.772 100.185,51.736 100.185,51.715 100.283,51.617 100.283,51.245 100.437,51.09 v1(100.437,50.959)
  Bottom Layer w0.127: v1(92.304,42.901) 97.897,42.901 ccw(c97.897,45.441) 100.437,45.441 100.437,49.736 ccw(c100.31,49.736) 100.397,49.829 cw(c100.736,50.19) 100.398,50.552 ccw(c100.31,50.644) 100.437,50.644 v1(100.437,50.959)
P0.28/AIN4: U1.41
P0.29/AIN5: U1.42
P0.30/AIN6: U1.43
P0.31/AIN7: U1.44
P1.00: P2.8 U1.24 | length 20.3
  Top Layer w0.127: P2.8 90.322,41.605 v1(92.278,41.605) ; v1@100.549,50.19 v1@100.553,50.19 ; U1.24 100.549,51.529 100.623,51.455 100.643,51.455 100.933,51.164 100.933,50.754 100.776,50.597 100.776,50.414 v1@100.553,50.19 ; v1(100.736,50.19) v1@100.553,50.19
  Bottom Layer w0.127: v1(92.278,41.605) 98.196,41.605 ccw(c98.196,44.145) 100.736,44.145 v1(100.736,50.19)
P1.08: P2.9 U1.8 | length 20
  Top Layer w0.127: P2.9 87.277,40.361 88.737,41.82 88.737,50.459 92.72,54.442 U1.8
P1.09: P2.2 U1.9 | length 11.9
  Top Layer w0.127: P2.2 90.322,51.105 93.259,54.042 U1.9
P1.15: U1.38
RF: J1.1 L2.2 | length 1.6
  Top Layer w0.127: L2.2 J1.1
SWDCLK: P?.2 U1.27 | length 10.1
  Top Layer w0.127: U1.27 102.34,53.642 102.412,53.569 105.75,50.232 P?.2@105.75,45.918
SWDIO: P?.4 U1.26 | length 8.9
  Top Layer w0.127: U1.26 102.359,53.242 103.75,51.851 P?.4@103.75,45.918
VDD_nrf: C6.1 C7.1 C8.1 C12.1 C13.1 P3.8 P?.1 R3.2 U1.12 U1.17 U1.25 U1.37 U1.48 | length 73.9
  Top Layer w0.127: v1(93.828,59.538) 93.888,59.477 94.962,59.477 95.148,59.291 C13.1 95.148,59.191 95.335,59.004 95.436,59.004 96.149,58.292 U1.48 ; C6.1 94.348,51.631 94.348,52.413 v1(94.336,52.426) 94.347,52.437 cw(c95.324,51.461) U1.12 ; P3.8 96.398,44.579 98.274,48.379 98.511,48.59 98.511,49.917 C7.1@97.805,50.622 ; U1.17 97.757,52.009 97.757,50.656 97.851,50.622 98.112,50.622 cw(c98.112,50.495) 98.121,50.622 v1(98.246,50.612) ; U1.37 100.554,58.072 C12.1@100.554,59.019 ; C12.1 100.599,59.09 101.61,59.09 v1(101.625,59.106) ; U1.25 101.547,52.842 101.58,52.808 101.58,50.845 v1(101.625,50.8) ; C8.1 101.625,50.12 v1(101.625,50.8) ; P?.1 105.486,44.055 105.105,44.436 104.367,44.436 103.421,45.382 102.683,45.382 102.683,49.742 v1(101.625,50.8)
  Bottom Layer w0.127: v1(98.246,50.612) 97.69,50.597 cw(c97.687,50.724) 97.687,50.597 94.945,50.597 94.336,51.206 v1(94.336,52.426) 93.828,52.934 v1(93.828,59.538) 101.194,59.538 cw(c101.194,59.106) v1(101.625,59.106) cw(c101.625,57.912) 102.819,57.912 102.819,51.994 ; v1(101.625,50.8) 102.819,51.994 ; v1(116.586,51.968) 116.561,51.994 102.819,51.994
XC1: C1.1 U1.35 X1.1 | length 4.8
  Top Layer w0.127: U1.35 102.75,56.842 103.241,57.333 103.642,57.734 X1.1
XC2: C2.1 U1.36 X1.3 | length 7.1
  Top Layer w0.127: U1.36 102.301,57.242 103.82,58.761 103.835,58.761 104.497,58.761 105.235,59.5 106.573,59.5 107.189,58.884 X1.3
pads on no net: J2.0 J2.1 J2.3 J2.5 P?.MH1 U1.28

## Polygon pours and split planes (outlines as drawn)
GND on Bottom Layer "GND_L02_P001" (solid, pour order 1): 84.049,64.948 127.508,64.948 127.508,39.319 84.049,39.319
GND on Top Layer "NONET_L01_P000" (solid, remove dead copper, shelved, pour order 0): 84.15,64.948 127.533,64.948 cw(c127.472,64.886) 127.559,64.886 127.559,39.141 84.15,39.141

## Other copper
Top Layer:
  pour cut-out: 94.691,58.699 102.006,58.699 102.006,51.384 94.691,51.384

## Text inside footprints (layer, text, board x,y; h text height)
P?: Top Overlay "4" at 101.886,46.445 h1.02; Top Overlay "2" at 106.486,46.445 h1.02; Top Overlay "3" at 101.886,43.045 h1.02; Top Overlay "1" at 106.586,43.045 h1.02